# Altium PCB magicGlove.PcbDoc
Units mil, origin at the board's own origin, x right, y up, seen from the top; angles counter-clockwise.
Board outline 3937.01 x 3937.01 mil, 2 copper layers (Top Layer, Bottom Layer); 87 components, 67 nets, 399 pads, 166 vias.
Unrouted connection lines stored in the file: 132.
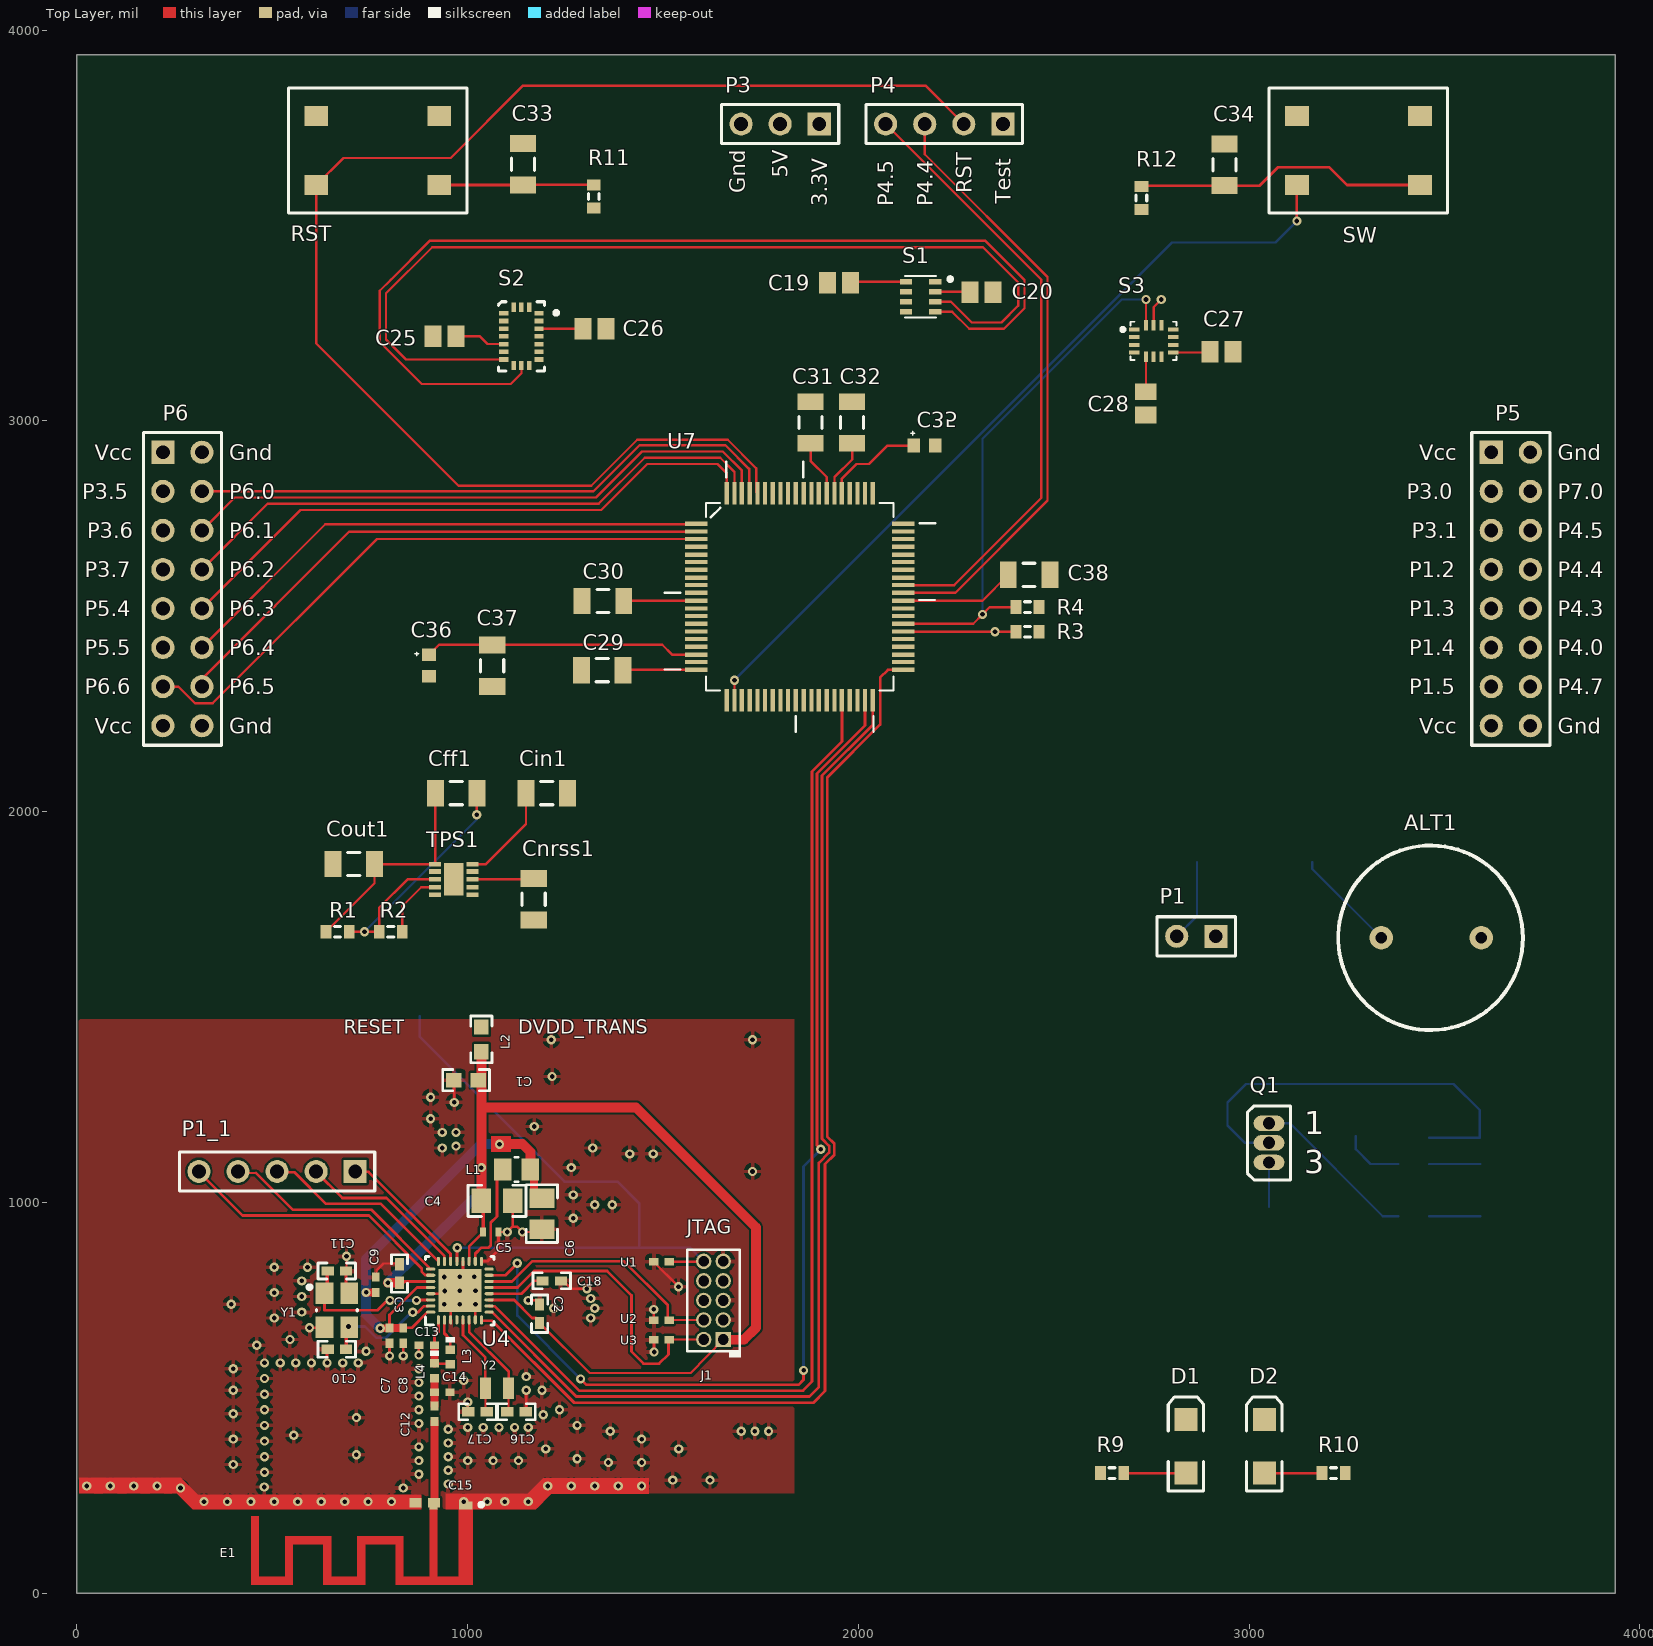
[diagram p0: Top Layer view]
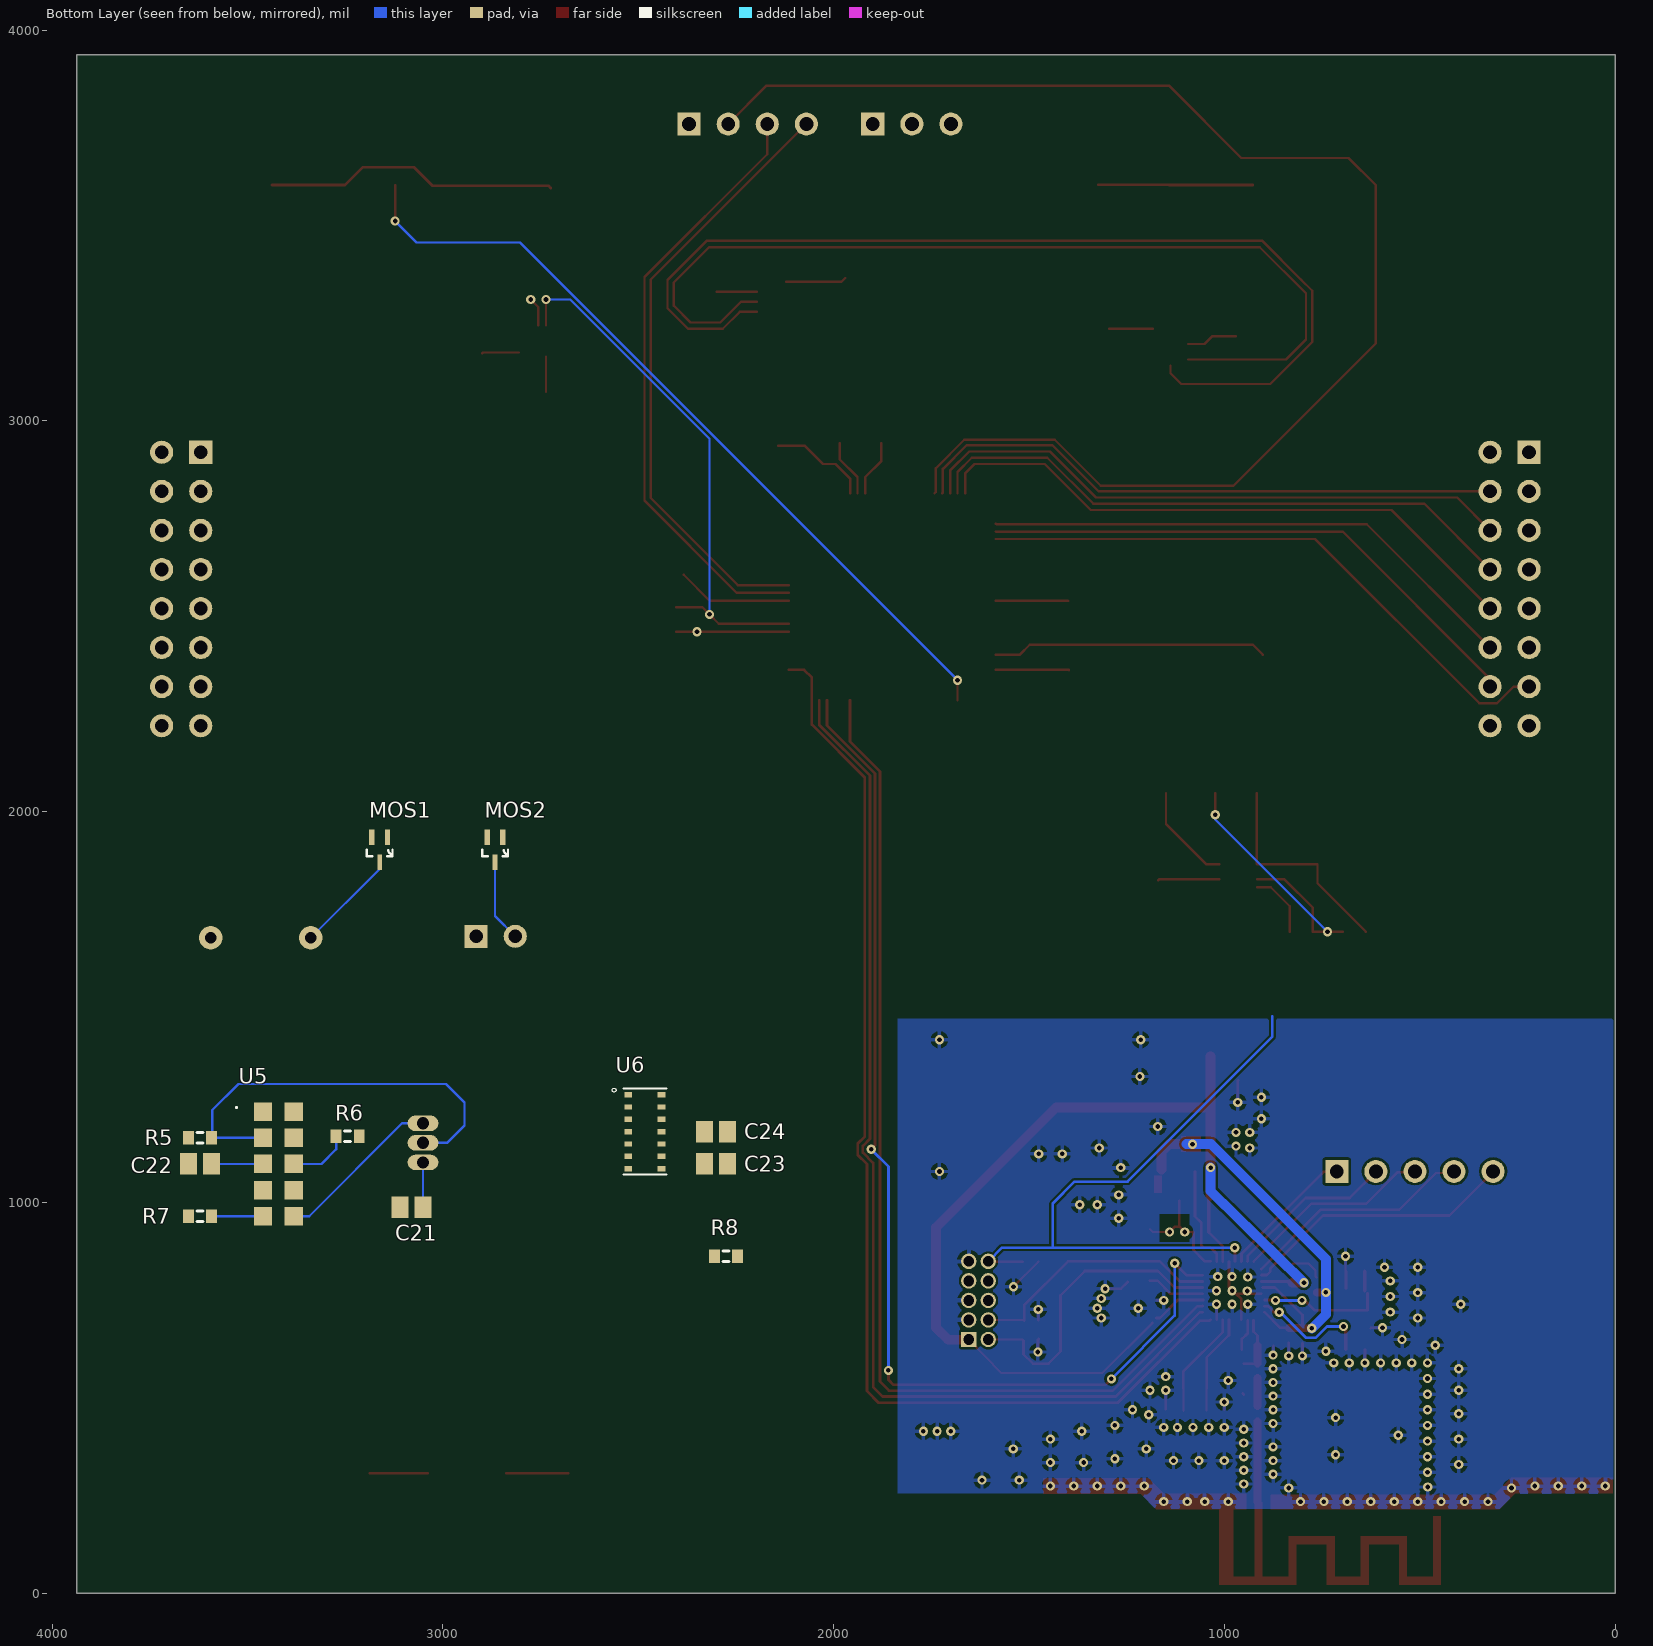
[diagram p1: Bottom Layer view, seen from below]

## Layer stack, top to bottom
Top Solder: solder mask 0.4, Solder Resist, Dk 3.5
Top Layer: signal copper 1.4
Dielectric1: dielectric 12.6, FR-4, Dk 4.8
Bottom Layer: signal copper 1.4
Bottom Solder: solder mask 0.4, Solder Resist, Dk 3.5

## Board outline
0,0 0,3937.01 3937.01,3937.01 3937.01,0

## Design rules (kind name [scope] priority, off if disabled: settings)
Clearance [All] p1: gap=6 ignorepadtopadclearanceinfootprint=FALSE
FabricationTestPointUsage TestPointUsage [All] p1: valid=0 allowmultiple=FALSE
FabricationTestpoint Testpoint [All] p1: side=3 testpointundercomponent=TRUE minsize=40 maxsize=100 preferedsize=60 minholesize=0 maxholesize=40 preferedholesize=32 testpointgrid=1 allowsidetop=TRUE allowsidebottom=TRUE usegrid=TRUE gridtolerance=0.01
PolygonConnect [All] p1: connectstyle=Relief reliefconductorwidth=10 reliefentries=4 polygonreliefangle="90 Angle" airgapwidth=10
RoutingVias [All] p1: holewidth=13.78 width=15.75 viastyle="Through Hole" minholewidth=11.81 minwidth=11.81 maxholewidth=236.22 maxwidth=255.91
SilkToSolderMaskClearance SilkscreenOverComponentPads [IsPad] p1: minsilkscreentomaskgap=10 clearancetoexposedcopper=TRUE
SolderMaskExpansion [All] p1: expansion=4
Width Width_1 [All] p1: maxlimit=10 minlimit=6 preferedwidth=6
Width 5v [InNet('5V')] p2: maxlimit=23.62 minlimit=5.98 preferedwidth=23.62
Width AVCC [InNet('AVCC')] p3: maxlimit=23.62 minlimit=5.98 preferedwidth=23.62
Width VCC [InNet('VCC')] p4: maxlimit=23.62 minlimit=5.98 preferedwidth=23.62
27 further rules are at their usual default settings.

## Classes and differential pairs
component class Actuadores: ALT1 MOS1 MOS2 P1
component class "AT short bus ( 7 x 4.8 inches)": Cff1 Cin1 Cnrss1 Cout1 R1 R2 TPS1
component class PuertosSensores: R3 R4
component class Sensores: C19 C20 C21 C22 C23 C24 C25 C26 C27 C28 Q1 R5 R6 R7 R8 S1 S2 S3 U5 U6
component class uProcesador: C29 C30 C31 C32 C33 C34 C35 C36 C37 C38 D1 D2 P3 P4 P5 P6 R9 R10 R11 R12 RST SW SW1 SW2

## Components (designator, comment, footprint, x,y, rotation, side; value= is the part's Value field where it differs from the comment)
ALT1 "*" Buzzer 3338.58,1677.17 r0 top
C1 "10uF" 0603 996.06,1312.99 r0 top
C2 "0.1uF" 0402 1184.31,715.17 r90 top
C3 "0.1uF" 0402 825.79,817.91 r90 top
C4 "10uF" 0805_HV 1075.31,1004.17 r0 top
C5 "0.1uF" 0402S 1059.21,924.17 r0 top
C6 "10uF" 0805_HV 1190.31,971.17 r270 top
C7 "0.1uF" 0402L 800.31,659.17 r270 top
C8 "0.1uF" 0402L 835.31,659.17 r270 top
C9 "" 0402L 765.31,789.17 r270 top value=10uF
C10 "" 0402 665.31,624.17 r180 top value=12pF (schematic designator C11)
C11 "" 0402 665.31,824.17 r0 top value=12pF (schematic designator C10)
C12 "GRM1555C1H120JA01D" 0402L 915.31,459.17 r90 top value=12pF
C13 "GRM1555C1H1R2CA01D" 0402L 895.31,634.17 r180 top value=1.2pF
C14 "GRM1555C1H1R2CA01D" 0402L 935.31,514.17 r0 top value=1.2pF
C15 "GRM1555C1H1R2CA01D" 0402 890.31,231.17 r0 top value=1.2pF
C16 "GRM1555C1H120JA01D" 0402 1125.31,464.17 r0 top value=12pF (schematic designator C17)
C17 "GRM1555C1H120JA01D" 0402 1025.31,464.17 r0 top value=12pF (schematic designator C16)
C18 "GRM155R61A105KE15D" 0402 1215.31,799.17 r180 top value=1uF
C19 "" C0805 1950.79,3354.33 r180 top value=100pF
C20 "" C0805 2315,3330 r0 top value=100pF
C21 "" C0805 3080.71,988.19 r0 bottom value=100pF
C22 "" C0805 3622.05,1098.43 r0 bottom value=100pF
C23 "" C0805 2301.18,1098.43 r180 bottom value=100pF
C24 "" C0805 2301.18,1181.1 r180 bottom value=100pF
C25 "" C0805 940.95,3216.54 r180 top value=100pF
C26 "" C0805 1324.8,3236.22 r0 top value=100pF
C27 "" C0805 2929.13,3177.17 r0 top value=100pF
C28 "" C0805 2736.22,3045.28 r270 top value=100pF
C29 "" C1206 1344.49,2362.2 r180 top value=100pF
C30 "" C1206 1346.46,2539.37 r0 top value=100pF
C31 "" C1206 1877.95,2996.06 r90 top value=100pF
C32 "" C1206 1984.25,2996.06 r90 top value=100pF
C33 "" C1206 1141.73,3657.48 r270 top value=100pF
C34 "" C1206 2937.01,3655.51 r270 top value=100pF
C35 "" "Cap Pol" 2169.29,2937.01 r180 top value=10uF
C36 "" "Cap Pol" 901.57,2374.02 r90 top value=10uF
C37 "" C1206 1062.99,2374.02 r90 top value=100pF
C38 "" C1206 2437.01,2606.3 r180 top value=100pF
Cff1 "" C1206 970.47,2047.24 r180 top value=100pF
Cin1 "" C1206 1202.76,2047.24 r180 top value=100pF
Cnrss1 "" C1206 1169.29,1775.59 r90 top value=100pF
Cout1 "" C1206 708.66,1866.14 r0 top value=100pF
D1 "" 3.2X1.6X1.1 2838.58,375.98 r90 top
D2 "" 3.2X1.6X1.1 3039.37,375.98 r90 top
E1 "ANTENNA_IIFA" ANTENNA_IIFA 995.31,234.17 r180 top net-tie
J1 "" CONN_GRPB052VWVN-RC 1629.31,749.17 r90 top
L1 "" 0805_145 1125.31,1084.17 r0 top value=10uH
L2 "BLM18HE152SN1D" 0603 1035.43,1417.32 r270 top value="1500 ohm"
L3 "LQG15HS15NJ02D" IND_LQG15H 955.31,604.17 r270 top value=15nH
L4 "LQG15HS2N0S02D" IND_LQG15H 915.31,569.17 r270 top value=2nH
MOS1 "*" SOT-523 3161.42,1901.57 r270 bottom
MOS2 "*" SOT-523 2866.14,1901.57 r270 bottom
P1 "" HDR1X2 2914.96,1681.1 r180 top
P1_1 "Header 5" HDR1X5 712.31,1079.17 r180 top (schematic designator P1)
P3 "" HDR1X3 1900,3760 r180 top
P4 "" HDR1X4 2370,3760 r180 top
P5 "" HDR2X8 3620,2920 r270 top
P6 "" HDR2X8 220,2920 r270 top
Q1 "" E3 3051.18,1152.36 r0 top
R1 "" J1-0603 667.32,1692.91 r180 top value=1K
R2 "" J1-0603 803.15,1692.91 r180 top value=1K
R3 "" J1-0603 2433.07,2460.63 r0 top value=1K
R4 "" J1-0603 2433.07,2523.62 r0 top value=1K
R5 "" J1-0603 3622.05,1165.35 r0 bottom value=1K
R6 "" J1-0603 3244.09,1169.29 r0 bottom value=1K
R7 "" J1-0603 3622.05,964.57 r180 bottom value=1K
R8 "" J1-0603 2275.59,862.2 r180 bottom value=1K
R9 "" J1-0603 2649.61,307.09 r0 top value=1K
R10 "" J1-0603 3216.54,307.09 r180 top value=1K
R11 "" J1-0603 1322.83,3574.8 r270 top value=1K
R12 "" J1-0603 2724.41,3570.87 r270 top value=1K
RST "*" CKN9085CT 770,3710 r180 top (schematic designator SW1)
S1 "*" LGA-8_BMP280(Primary) 2159.45,3317.91 r0 top
S2 "BMX055" LGA_PACKAGE_20_PINS 1137.8,3216.54 r0 top
S3 "*" LGA14R50P5X4_300X250X83 2755.91,3204.72 r0 top
SW "*" CKN9085CT 3280,3710 r180 top (schematic designator SW2)
TPS1 "TPS63030DSKT" SON50P260X260X80-11N 964.57,1826.77 r0 top
U1 "TPD1E10B06DPYR" DPY0002A 1496.31,848.17 r180 top
U2 "TPD1E10B06DPYR" DPY0002A 1496.31,698.17 r180 top
U3 "TPD1E10B06DPYR" DPY0002A 1496.31,648.17 r180 top
U4 "*" RSM0032B_NV 980.31,774.17 r90 top value=Value
U5 "VCNL4100" VISHAY_VCNL4100_8X3X1.8 3421.26,1098.42 r180 bottom
U6 "MAX30100EFD+" LGA14R80P2X7_560X280X130 2483.27,1181.1 r180 bottom
U7 "MSP430F5529IPN" QFP50P1400X1400X160-80N 1850,2550 r0 top
Y1 "TSX-3225 24.0000MF20G-AC0-ND" EPSON_TSX-3225 665.31,724.17 r0 top
Y2 "FC-12M 32.7680KA-A3" Epson_FC-12M 1075.31,524.17 r0 top

## Footprints (in the part's own frame and the unit in brackets; to place one, negate y for a bottom-side part, rotate by r counter-clockwise, add the part's x,y. Pads: shape width x height; smd on the part's side, far side on the other; paste and mask are expansions set on the pad)
3.2X1.6X1.1 [mm] "SMT LED; 2 Flat Leads"
  rect 1.5x1.5 smd: 1(-1.75,0) 2(1.75,0)
  silkscreen extent -2.9,-1.15 3.2,1.15
0402 [mm] "0402 from SM-752 data"
  rect 0.8x0.6 smd: 1(-0.6,0) 2(0.6,0)
  silkscreen extent -1.22,-0.52 1.22,0.52, body extent -0.55,-0.3 0.55,0.3, height 0.6
0402L [mm] "0402 from SM-752 data"
  rect 0.6x0.5 smd: 1(-0.5,0) 2(0.5,0)
  body extent -0.55,-0.3 0.55,0.3, height 0.6
0402S [mil] "Based on C0402S footprint from PADS legacy"
  rect 15x24 smd: 1(-20,0) 2(20,0)
  body extent -22,-12 22,12, height 24
0603 [mm] "0603 from SM-752 data"
  rect 1x0.95 smd: 1(-0.8,0) 2(0.8,0)
  silkscreen extent -1.52,-0.69 1.52,0.69, body extent -0.87,-0.47 0.87,0.47, height 1
0805_145 [mm] "0805 / 1.45mm height"
  rect 1.15x1.45 smd: 1(-0.9,0) 2(0.9,0)
  silkscreen extent -0.1,-0.8 0.1,0.8, body extent -1.1,-0.72 1.1,0.72, height 1.45
0805_HV [mil] "0805 with 30mil clearance between pads"
  rect 50x63 smd: 1(-40,0) 2(40,0)
  silkscreen extent -74,-40 74,40, body extent -43,-29 43,29, height 57
ANTENNA_IIFA [mm] "PCB Antenna, 2-Leads"
  rect 0.9x0.5 smd paste-1 mask-1: 1(0,0.25)
  rect 0.5x0.5 smd paste-1 mask-1: 2(2.1,0.25)
  Top Layer region: -0.45,0 -0.45,5.4 4.55,5.4 4.55,2.76 6.55,2.76 6.55,5.4 9.25,5.4 9.25,2.76 11.25,2.76 11.25,5.4 13.95,5.4 13.95,0.96 13.45,0.96 13.45,4.9 11.75,4.9 11.75,2.26 8.75,2.26 8.75,4.9 7.05,4.9 7.05,2.26 4.05,2.26 4.05,4.9 2.35,4.9 2.35,0 1.85,0 1.85,4.9 0.45,4.9 0.45,0
  silkscreen extent -1.1,0.11 -0.9,0.31
Buzzer [mil]
  round 60 hole 30: 1(0,0) 2(255.91,0)
  silkscreen extent -110,-236 362,236
C0805 [mm] "Chip Capacitor, Body 2.0x1.3mm, IPC High Density"
  rect 1.1x1.4 smd: 1(-0.75,0) 2(0.75,0)
  body extent -1.1,-0.72 1.1,0.72, height 1.4
C1206 [mm] "Chip Capacitor, Body 3.2x1.6mm, IPC High Density"
  rect 1.1x1.7 smd: 1(-1.35,0) 2(1.35,0)
  silkscreen extent -0.4,-0.75 0.4,0.75, body extent -1.7,-0.9 1.7,0.9, height 1.3
"Cap Pol" [mm] "Chip Capacitor, Body 1.6x0.8mm, IPC High Density"
  rect 0.8x0.9 smd: 1(-0.7,0) 2(0.7,0)
  silkscreen extent 0.65,-0.94 0.88,-0.69, body extent -0.87,-0.48 0.87,0.48, height 1.3
CKN9085CT [mm]
  rect 1.55x1.3 smd: 1(-4,2.7) 2(4,2.7) 3(-4,-1.8) 4(4,-1.8)
  silkscreen extent -5.8,-3.6 5.8,4.5, body extent -4.5,-2.6 4.5,3.4, height 5
CONN_GRPB052VWVN-RC [mm] "SULLINS"
  rect 1x1 hole 0.7 mask+0.08: 1(-2.54,-0.635)
  round 1 hole 0.7 mask+0.08: 2(-2.54,0.635) 3(-1.27,-0.635) 4(-1.27,0.635) 5(0,-0.635) 6(0,0.635) 7(1.27,-0.635) 8(1.27,0.635) 9(2.54,-0.635) 10(2.54,0.635)
  silkscreen extent -3.7,-1.8 3.3,1.7, body extent -3.17,-1.7 3.17,1.7, height 4
DPY0002A [mm] "R-PX2SON-N2"
  rect 0.6x0.5 smd: 1(-0.5,0) 2(0.5,0)
  body extent -0.55,-0.35 0.55,0.35, height 0.4
E3 [mm] "TO, Flat Index; 3 In-Line, Axial Leads; Body Dia. 4.6mm; Lead Dia. 0.5 mm (max)"
  oval 2x1 hole 0.8: 1(0,1.27) 2(0,0) 3(0,-1.27)
  silkscreen extent -1.41,-2.41 1.41,2.41
Epson_FC-12M [mm] "Epson"
  rect 0.7x1.4 smd: 1(-0.75,0) 2(0.75,0)
  body extent -1.05,-0.63 1.05,0.63, height 0.6
EPSON_TSX-3225 [mm] "SMD, 4-Leads, Body 2.65x3.35mm, Height 0.6mm"
  rect 1.15x1.4 smd: 1(-0.8,1.1) 2(-0.8,-1.1) 3(0.8,-1.1) 4(0.8,1.1)
  silkscreen extent -1.9,-0.05 1.33,1.62, body extent -1.33,-1.68 1.33,1.68, height 0.61
HDR1X2 [mm] "Connector; Header; 2 Position"
  rect 1.5x1.5 hole 0.9: 1(0,0)
  round 1.5 hole 0.9: 2(2.54,0)
  silkscreen extent -1.27,-1.27 3.81,1.27
HDR1X3 [mm] "Connector; Header; 3 Position"
  rect 1.5x1.5 hole 0.9: 1(0,0)
  round 1.5 hole 0.9: 2(2.54,0) 3(5.08,0)
  silkscreen extent -1.27,-1.27 6.35,1.27
HDR1X4 [mm] "Connector; Header; 4 Position"
  rect 1.5x1.5 hole 0.9: 1(0,0)
  round 1.5 hole 0.9: 2(2.54,0) 3(5.08,0) 4(7.62,0)
  silkscreen extent -1.27,-1.27 8.89,1.27
HDR1X5 [mm] "Connector; Header; 5 Position"
  rect 1.5x1.5 hole 0.9: 1(0,0)
  round 1.5 hole 0.9: 2(2.54,0) 3(5.08,0) 4(7.62,0) 5(10.16,0)
  silkscreen extent -1.27,-1.27 11.43,1.27
HDR2X8 [mm] "Connector; Header; 8x2 Position"
  rect 1.5x1.5 hole 0.9: 1(0,0)
  round 1.5 hole 0.9: 2(0,2.54) 3(2.54,0) 4(2.54,2.54) 5(5.08,0) 6(5.08,2.54) 7(7.62,0) 8(7.62,2.54) 9(10.16,0) 10(10.16,2.54) 11(12.7,0) 12(12.7,2.54) 13(15.24,0) 14(15.24,2.54) 15(17.78,0) 16(17.78,2.54)
  silkscreen extent -1.27,-1.27 19.05,3.81
IND_LQG15H [mm] "MuRata"
  rect 0.55x0.6 smd: 1(-0.475,0) 2(0.475,0)
  silkscreen extent -1.3,-0.3 -0.95,0.3, body extent -0.52,-0.27 0.52,0.27, height 0.55
J1-0603 [mm] "Chip Resistor, Body 1.6x0.8mm, IPC High Density"
  rect 0.7x0.9 smd: 1(-0.75,0) 2(0.75,0)
  silkscreen extent -0.2,-0.35 0.2,0.35, body extent -0.85,-0.48 0.85,0.48, height 0.9
LGA14R50P5X4_300X250X83 [mm]
  rect 0.675x0.25 smd paste-25.4 mask-25.4: 1(-1.263,0.75) 2(-1.263,0.25) 3(-1.263,-0.25) 4(-1.263,-0.75) 8(1.263,-0.75) 9(1.263,-0.25) 10(1.263,0.25) 11(1.263,0.75)
  rect 0.25x0.675 smd paste-25.4 mask-25.4: 5(-0.5,-1.012) 6(0,-1.012) 7(0.5,-1.012) 12(0.5,1.013) 13(0,1.013) 14(-0.5,1.013)
  silkscreen extent -2.1,-1.25 1.5,1.25
LGA14R80P2X7_560X280X130 [mm]
  rect 0.5x0.35 smd paste-25.4 mask-25.4: 1(-1.075,2.4) 2(-1.075,1.6) 3(-1.075,0.8) 4(-1.075,0) 5(-1.075,-0.8) 6(-1.075,-1.6) 7(-1.075,-2.4) 8(1.075,-2.4) 9(1.075,-1.6) 10(1.075,-0.8) 11(1.075,0) 12(1.075,0.8) 13(1.075,1.6) 14(1.075,2.4)
  silkscreen extent -2.13,-2.8 1.4,2.83
LGA-8_BMP280(Primary) [mm]
  rect 0.8x0.35 smd paste-25.4 mask-25.4: P1(0.95,0.975) P2(0.95,0.325) P3(0.95,-0.325) P4(0.95,-0.975) P5(-0.95,-0.975) P6(-0.95,-0.325) P7(-0.95,0.325) P8(-0.95,0.975)
  silkscreen extent -1,-1.35 2.02,1.35
LGA_PACKAGE_20_PINS [mm]
  rect 0.6x0.3 smd: 1(1.15,1.5) 2(1.15,1) 3(1.15,0.5) 4(1.15,0) 5(1.15,-0.5) 6(1.15,-1) 7(1.15,-1.5) 11(-1.15,-1.5) 12(-1.15,-1) 13(-1.15,-0.5) 14(-1.15,0) 15(-1.15,0.5) 16(-1.15,1) 17(-1.15,1.5)
  rect 0.3x0.6 smd: 8(0.5,-1.9) 9(0,-1.9) 10(-0.5,-1.9) 18(-0.5,1.9) 19(0,1.9) 20(0.5,1.9)
  silkscreen extent -1.5,-2.25 2.39,2.25
QFP50P1400X1400X160-80N [mil]
  rect 58x11 smd paste-1000 mask-1000: 1(-265,187) 2(-265,167) 3(-265,148) 4(-265,128) 5(-265,108) 6(-265,89) 7(-265,69) 8(-265,49) 9(-265,30) 10(-265,10) 11(-265,-10) 12(-265,-30) 13(-265,-49) 14(-265,-69) 15(-265,-89) 16(-265,-108) 17(-265,-128) 18(-265,-148) 19(-265,-167) 20(-265,-187) 41(265,-187) 42(265,-167) 43(265,-148) 44(265,-128) 45(265,-108) 46(265,-89) 47(265,-69) 48(265,-49) 49(265,-30) 50(265,-10) 51(265,10) 52(265,30) 53(265,49) 54(265,69) 55(265,89) 56(265,108) 57(265,128) 58(265,148) 59(265,167) 60(265,187)
  rect 11x58 smd paste-1000 mask-1000: 21(-187,-265) 22(-167,-265) 23(-148,-265) 24(-128,-265) 25(-108,-265) 26(-89,-265) 27(-69,-265) 28(-49,-265) 29(-30,-265) 30(-10,-265) 31(10,-265) 32(30,-265) 33(49,-265) 34(69,-265) 35(89,-265) 36(108,-265) 37(128,-265) 38(148,-265) 39(167,-265) 40(187,-265) 61(187,265) 62(167,265) 63(148,265) 64(128,265) 65(108,265) 66(89,265) 67(69,265) 68(49,265) 69(30,265) 70(10,265) 71(-10,265) 72(-30,265) 73(-49,265) 74(-69,265) 75(-89,265) 76(-108,265) 77(-128,265) 78(-148,265) 79(-167,265) 80(-187,265)
  silkscreen extent -346,-346 347,346
RSM0032B_NV [mm]
  oval 0.6x0.2 smd paste+0 mask+0.051: 1(-1.9,1.4) 2(-1.9,1) 3(-1.9,0.6) 4(-1.9,0.2) 5(-1.9,-0.2) 6(-1.9,-0.6) 7(-1.9,-1) 8(-1.9,-1.4) 17(1.9,-1.4) 18(1.9,-1) 19(1.9,-0.6) 20(1.9,-0.2) 21(1.9,0.2) 22(1.9,0.6) 23(1.9,1) 24(1.9,1.4)
  oval 0.2x0.6 smd paste+0 mask+0.051: 9(-1.4,-1.9) 10(-1,-1.9) 11(-0.6,-1.9) 12(-0.2,-1.9) 13(0.2,-1.9) 14(0.6,-1.9) 15(1,-1.9) 16(1.4,-1.9) 25(1.4,1.9) 26(1,1.9) 27(0.6,1.9) 28(0.2,1.9) 29(-0.2,1.9) 30(-0.6,1.9) 31(-1,1.9) 32(-1.4,1.9)
  rect 2.8x2.8 smd paste-1.387 mask+0.051: 33(0,0)
  silkscreen extent -2.22,-2.23 2.22,2.23, body extent 0,0 0.25,0.25, height 0.25
SON50P260X260X80-11N [mil]
  rect 30x12 smd paste-1000 mask-1000: 1(-48,39) 2(-48,20) 3(-48,0) 4(-48,-20) 5(-48,-39) 6(48,-39) 7(48,-20) 8(48,0) 9(48,20) 10(48,39)
  rect 51x83 smd paste-1000 mask-1000: 11(0,0)
SOT-523 [mil]
  rect 40x14 smd paste-1000 mask-1000: 1(-33.38,19.37) 2(-33.38,-20.63)
  rect 40x12 smd paste-1000 mask-1000: 3(30.62,-0.63)
  silkscreen extent -1,-34 16,32
VISHAY_VCNL4100_8X3X1.8 [mm]
  rect 1.2x1.2 smd paste-25.4 mask-25.4: 1(-1,3.4) 2(-1,1.7) 3(-1,0) 4(-1,-1.7) 5(-1,-3.4) 6(1,-3.4) 7(1,-1.7) 8(1,0) 9(1,1.7) 10(1,3.4)
  silkscreen extent -2.78,3.62 -2.68,3.72

## Part data
ALT1: library part ABT-407
C1: library part C1608X5R1A106M08, "Imported", Manufacturer_Part_Number=C1608X5R1A106M080AC, C="Copyright (C) 2015 Accelerated Designs. All rights reserved", Copyright="Copyright (C) 2015 Accelerated Designs. All rights reserved", Vendor=TDK
C2 C3 C4 C5 C6 C7 C8: library part GRM155R71A104KA0, "Imported", Manufacturer_Part_Number=GRM155R71A104KA01D, Value1=10V, C="Copyright (C) 2015 Accelerated Designs. All rights reserved", Copyright="Copyright (C) 2015 Accelerated Designs. All rights reserved", Vendor=Murata
C9 C10 C11 C29 C30 C31 C32 C33 C34 C37 C38 Cff1 Cin1 Cnrss1 Cout1: library part "Cap Semi", "Capacitor (Semiconductor SIM Model)", LatestRevisionDate=29-May-2009, LatestRevisionNote="IPC-7351 Footprint Added.", PackageDescription="Chip Capacitor", PackageReference=C1206, Published=8-Jun-2000, Publisher="Altium Limited"
C12 C16 C17: "CAP, CERM, 12 pF, 50 V, +/- 5%, C0G/NP0, 0402", Cap_Case=0402, Manufacturer=MuRata, Supplier Part Number 1=81-GRM1555C1H120JA1D, TempCo=C0G/NP0, Tolerance_%=5, Value1=Unknown, Value2=50V, ValueDisplayed=12pF, AEC Category=Q200, AEC Qualified=?, Cap_F=0.000000000012, ComponentLink1Description="Datasheet link", ComponentLink1URL=http://search.murata.co.jp/Ceramy/PnsearchViewAction.do?HnOFG=ON&HnNFG=ON&SEL_CNT=50&sLang=en&sKey=GRM1555C1H120JA01D&x=9&y=9&search=startwith, CompType=Capacitor, LatestRevisionDate=2016-02-01, MountType=SMT, PackageReference=0402, PartNumber=GRM1555C1H120JA01D, Polarized=N, Published=2008-06-19, Publisher="Texas Instruments", RoHS=Y, Supplier 1=Mouser, Supplier 2=Farnell, Supplier 3=Newark, Supplier Part Number 2=1828875, Supplier Part Number 3=14T3292, SymbolVersion=2008-07-09, TaMax_C=125, TaMin_C=-55, Technology=Ceramic, U/M=EA, VDC_V=50
C13 C14 C15: "CAP, CERM, 1.2 pF, 50 V, +/- 5%, C0G/NP0, 0402", Cap_Case=0402, Manufacturer=MuRata, Supplier Part Number 1=81-GRM1555C1H1R2CA1D, TempCo=C0G/NP0, Tolerance_%=5, Value1=Unknown, Value2=50V, ValueDisplayed=1.2pF, AEC Category=Q200, AEC Qualified=?, Cap_F=0.0000000000012, ComponentLink1Description="Datasheet link", ComponentLink1URL=http://search.murata.co.jp/Ceramy/image/img/PDF/ENG/GRM1555C1H1R2CA01.pdf, CompType=Capacitor, LatestRevisionDate=2016-02-01, MountType=SMT, PackageReference=0402, PartNumber=GRM1555C1H1R2CA01D, Polarized=N, Published=2008-06-19, Publisher="Texas Instruments", RoHS=Y, Supplier 1=Mouser, SymbolVersion=2008-07-09, TaMax_C=125, TaMin_C=-55, Technology=Ceramic, U/M=EA, VDC_V=50
C18: "CAP, CERM, 1 µF, 10 V, +/- 10%, X5R, 0402", Cap_Case=0402, Manufacturer=MuRata, Supplier Part Number 1=490-3890-1-ND, TempCo=X5R, Tolerance_%=10, Value1=Unknown, Value2=10V, ValueDisplayed=1µF, AEC Category=Q200, AEC Qualified=?, Cap_F=0.000001, ComponentLink1Description="Datasheet link", ComponentLink1URL=http://search.murata.co.jp/Ceramy/PnsearchViewAction.do?HnOFG=ON&HnNFG=ON&SEL_CNT=50&sLang=en&sKey=GRM155R61A105KE15D&x=9&y=9&search=startwith, CompType=Capacitor, LatestRevisionDate=2016-01-22, MountType=SMT, PackageReference=0402, PartNumber=GRM155R61A105KE15D, Polarized=N, Published=2008-06-19, Publisher="Texas Instruments", RoHS=Y, Supplier 1=Digi-Key, Supplier 2=Mouser, Supplier 3=Farnell, Supplier Part Number 2=81-GRM155R61A105KE15, Supplier Part Number 3=1735523, SymbolVersion=2008-07-09, TaMax_C=85, TaMin_C=-55, Technology=Ceramic, U/M=EA, VDC_V=10
C19 C20 C21 C22 C23 C24 C25 C26 C27 C28: library part "Cap Pol3", "Polarized Capacitor (Surface Mount)", LatestRevisionDate=29-May-2009, LatestRevisionNote="IPC-7351 Footprint Added.", PackageDescription="Chip Capacitor", PackageReference=C0805, Published=8-Jun-2000, Publisher="Altium Limited"
C35 C36: library part "Cap Pol", "Capacitor pol", LatestRevisionDate=29-May-2009, LatestRevisionNote="IPC-7351 Footprint Added.", PackageDescription="Chip Capacitor", PackageReference=C1206, Published=8-Jun-2000, Publisher="Altium Limited"
D1 D2: library part LED2, "Typical RED, GREEN, YELLOW, AMBER GaAs LED", LatestRevisionDate=17-Jul-2002, LatestRevisionNote="Re-released for DXP Platform.", PackageDescription="SM LED; 2 Flat Leads", PackageReference=3.2X1.6X1.1, PackageVersion=Feb-2002, Published=8-Jun-2000, Publisher="Altium Limited"
E1: "PCB Antenna.  There is nothing to buy or mount.", Manufacturer=N/A, ComponentLink1Description="Datasheet Link", ComponentLink1URL=http://www.ti.com/lit/an/swra117d/swra117d.pdf, CompType=Antenna, LatestRevisionDate=2015-03-27, MountType=N/A, PackageReference="PCB Antenna, 2-Leads", PartNumber=ANTENNA_IIFA, Publisher="Texas Instruments", SymbolCreator=Altium, SymbolVersion=2014-08-20
J1: library part "Header 5X2", "Header, 5-Pin, Dual row", LatestRevisionDate=17-Jul-2002, LatestRevisionNote="Re-released for DXP Platform.", Publisher="Altium Limited"
L1: library part "Inductor Iron", "Magnetic-Core Inductor", LatestRevisionDate=17-Jul-2002, LatestRevisionNote="Re-released for DXP Platform.", PackageDescription="Axial Device, Thru-Hole; 2 Leads; 0.9 in Pin Spacing", PackageReference=AXIAL-0.9, Published=24-Mar-1999, Publisher="Altium Limited"
L2: "Ferrite Bead, 1500 ohm @ 100 MHz, 0.5 A, 0603", Manufacturer=MuRata, Supplier Part Number 1=490-5216-1-ND, Value1="0.5 ohm", Value2=0.5A, ComponentLink1Description="Datasheet link", ComponentLink1URL=http://search.murata.co.jp/Ceramy/image/img/PDF/ENG/L0110S0101BLM18H.pdf, CompType="Ferrite Bead", DCR_ohm=0.5, Imax_A=0.5, LatestRevisionDate=2016-02-02, MountType=SMT, PackageReference=0603, PartNumber=BLM18HE152SN1D, Published=2014-04-30, Publisher="Texas Instruments", RoHS=Y, Supplier 1=Digi-Key, Supplier 2=Mouser, Supplier 3=Farnell, Supplier Part Number 2=81-BLM18HE152SN1D, Supplier Part Number 3=2443237RL, SymbolVersion=2009-06-02, Ztyp@1GHz_Ohm=1500, ZTyp@100MHz_Ohm=1500
L3: "Inductor, Multilayer, Air Core, 15 nH, 0.3 A, 0.32 ohm, SMD", Manufacturer=MuRata, Supplier Part Number 1=490-2625-1-ND, Value1="0.32 ohm", Value2=0.3A, ValueDisplayed=15nH, AEC Category=Q200, AEC Qualified=?, ComponentLink1Description="Datasheet link", ComponentLink1URL=http://search.murata.co.jp/Ceramy/image/img/PDF/ENG/L0075S0083LQG15HS.pdf, CompType=Inductor, DCR_ohm=0.32, Imax_A=0.3, Ind_H=15.0E-9, Irms="0.3A @ C rise", Isat="0.3A @ % inductance drop", LatestRevisionDate=2016-01-08, Material="Air Core", MountType=SMT, PackageReference="0402 polarized", PartNumber=LQG15HS15NJ02D, Published=2008-06-26, Publisher="Texas Instruments", RoHS=Y, Supplier 1=Digi-Key, Supplier 2=Mouser, Supplier Part Number 2=81-LQG15HS15NJ02D, SymbolVersion=2008-07-23, Technology=Multilayer
L4: "Inductor, Multilayer, Air Core, 2 nH, 0.3 A, 0.1 ohm, SMD", Manufacturer=MuRata, Supplier Part Number 1=490-6569-1-ND, Value1="0.1 ohm", Value2=0.3A, ValueDisplayed=2nH, AEC Category=Q200, AEC Qualified=?, ComponentLink1Description="Datasheet link", ComponentLink1URL=http://search.murata.co.jp/Ceramy/image/img/PDF/ENG/L0075S0083LQG15HS.pdf, CompType=Inductor, DCR_ohm=0.1, Imax_A=0.3, Ind_H=2.0E-9, Irms="0.3A @ C rise", Isat="0.3A @ % inductance drop", LatestRevisionDate=2016-01-08, Material="Air Core", MountType=SMT, PackageReference="0402 polarized", PartNumber=LQG15HS2N0S02D, Published=2008-06-26, Publisher="Texas Instruments", RoHS=Y, Supplier 1=Digi-Key, Supplier 2=Mouser, Supplier Part Number 2=81-LQG15HS2N0S02D, SymbolVersion=2008-07-23, Technology=Multilayer
MOS1 MOS2: library part MOSFETN
P1: library part "Header 2", "Header, 2-Pin", LatestRevisionDate=17-Jul-2002, LatestRevisionNote="Re-released for DXP Platform.", Publisher="Altium Limited"
P1_1: "Header, 5-Pin", LatestRevisionDate=17-Jul-2002, LatestRevisionNote="Re-released for DXP Platform.", Publisher="Altium Limited"
P3: library part "Header 3", "Header, 3-Pin", LatestRevisionDate=17-Jul-2002, LatestRevisionNote="Re-released for DXP Platform.", Publisher="Altium Limited"
P4: library part "Header 4", "Header, 4-Pin", LatestRevisionDate=17-Jul-2002, LatestRevisionNote="Re-released for DXP Platform.", Publisher="Altium Limited"
P5 P6: library part "Header 8X2", "Header, 8-Pin, Dual row", LatestRevisionDate=17-Jul-2002, LatestRevisionNote="Re-released for DXP Platform.", Publisher="Altium Limited"
Q1: library part MOSFET-P, "P-Channel MOSFET", LatestRevisionDate=17-Jul-2002, LatestRevisionNote="Re-released for DXP Platform.", PackageDescription="TO, Flat Index; 3 In-Line, Axial Leads; Body Dia. 4.6mm; Lead Dia. 0.5 mm (max)", PackageReference=E3, PackageVersion=1995/1996, Published=8-Jun-2000, Publisher="Altium Limited"
R1 R2 R3 R4 R5 R6 R7 R8 R9 R10 R11 R12: library part Res3, "Resistor", LatestRevisionDate=29-May-2009, LatestRevisionNote="IPC-7351 Footprint Added.", PackageDescription="Chip Resistor", PackageReference=J1-0603, Published=8-Jun-2000, Publisher="Altium Limited"
RST SW: library part CKN9085CT
S1: library part BMP280, "BMP280 Absolute Barometric Pressure Sensor for Battery Powered Devices 2 x 2.5mm", Package=None, Availability=Good, MF=Bosch, MP=BMP280, Price="2.16 USD"
S2: "Small versatile 9-axis sensor module", Manufacturer_Name="Bosch Sensortec", Datasheet Link=http://www.mouser.com/ds/2/621/BST-BMX055-DS000-02-586421.pdf, Height=mm, Manufacturer_Part_Number=BMX055, Supplier_Name=RS
S3: library part LSM6DSMTR, "Small versatile 6-axis acc&gyro"
TPS1: "TPS7A91 (ACTIVE)  1-A, High Accuracy, Low Noise LDO Voltage Regulator", Package="WSON-10 Texas Instruments", Availability=Good, MF="Texas Instruments", MP=TPS63030DSKT, Price="1.51 USD"
U1 U2 U3: "ESD in 0402 Package with 10 pF Capacitance and 6 V Breakdown, 1 Channel, -40 to +125 degC, 2-pin X2SON (DPY), Green (RoHS & no Sb/Br)", Alternate Manufacturer=None, Alternate PartNumber=Equivalent, Breakdown Voltage(Min)(V)=6, IO Capacitance(Typ)(pF)=10, Manufacturer="Texas Instruments", Supplier Part Number 1=296-30406-2-ND, ComponentLink1Description=Datasheet, ComponentLink1URL=http://www.ti.com/general/docs/lit/getliterature.tsp?genericPartNumber=TPD1E10B06&fileType=pdf, ComponentLink2Description="URL Link1", ComponentLink2URL=SamplesURL:http://www.ti.com/product/tpd1e10b06#samples, DatasheetVersion=SLLSEB1, Eco-Plan=TBD, IEC 61000-4-2 Air-Gap(+/- kV)=30, IEC 61000-4-2 Contact(+/- kV)=30, IO Leakage Current(nA)=10, MountType=SMT, PackageDescription="2-Pin Plastic Small Outline No-Lead 1.0 x 0.6 x 0.4 mm Body", PackageReference=DPY0002A, PackageVersion="revA, Apr-2010", PartNumber=TPD1E10B06DPYR, SubFamily="ESD Solution", Supplier 1=Digi-Key, Supplier 2=Digi-Key, Supplier 3=Digi-Key, Supplier 4=Newark, Supplier 5=Mouser, Supplier Part Number 2=296-30406-1-ND, Supplier Part Number 3=296-30406-6-ND, Supplier Part Number 4=94T1842, Supplier Part Number 5=595-TPD1E10B06DPYR
U4: library part CC2640R2FRSMR_1, "Imported", Manufacturer="Texas Instruments", PartNumber=CC2640R2FRSMR, RefDes=RefDes, TYPE=TYPE
U5: "High Sensitivity Long Distance Proximity Sensor. Dimensions (L x W x H in mm): 8", Package=None, Availability=Good, MF=Vishay, MP=VCNL4100, Price="3.52 USD"
U6: "Pulse Oximeter and Heart-Rate Sensor IC 14-Pin OLGA", Package=None, Availability=Good, MF="Maxim Integrated", MP=MAX30100EFD+, Price="4.00 USD"
U7: "16-Bit Ultra-Low-Power Microcontroller, 128KB Flash, 8KB RAM, USB, 12Bit ADC, 2 USCIs, 32Bit HW MPY 80-LQFP -40 to 85", Package="LQFP-80 Texas Instruments", Availability=Good, MF="Texas Instruments", MP=MSP430F5529IPN, Price="6.15 USD"
Y1: library part "TSX-3225 24.0000MF20G-AC3", Supplier 1=Digikey, Supplier Part Number 1="TSX-3225 24.0000MF20G-AC0-ND"
Y2: "Crystal, 32.768kHz, 12.5pF, SMD", Frequency=32.768KHZ, Frequency Stability=±20ppm, Manufacturer=Epson, Supplier Part Number 1=SER3672CT-ND, ComponentLink1Description="Datasheet Link", ComponentLink1URL=http://www.eea.epson.com/portal/pls/portal/docs/1/1587453.PDF, CompType=Crystal, LatestRevisionDate=2015-03-19, MountType=SMT, PackageReference="Crystal 2.05x.6x1.2mm", PartNumber="FC-12M 32.7680KA-A3", Publisher="Texas Instruments", RoHS=Y, Supplier 1=Digi-Key, Supplier 2=Mouser, Supplier Part Number 2=732-FC-12M-32.76KAA3, SymbolCreator=a0412235, SymbolVersion=2008-07-09, TaMax_C=85, TaMin_C=-40, U/M=EA

## Via types
v1: diameter 23.62, hole 11.81, Top Layer to Bottom Layer, tented both sides, 156 vias
v2: diameter 23.62, hole 11.81, Top Layer to Bottom Layer, 10 vias

## Nets (pads, with @x,y where several pads share a name; then routed paths per layer and width w, separated by ;. In a path a pad name is that pad's centre, name@x,y a point inside that pad or via, vN(x,y) a via of type N, cw(c..) or ccw(c..) an arc to the next point about the centre after c; other vN are vias at no path point)
5V: C35.2 P3.2 U7.65 | length 256.3
  Top Layer w6: U7.65 1958,2852.7 1995.07,2889.76 2027.56,2889.76 2074.8,2937.01 C35.2
AGND: C23.2 C30.1 MOS1.2 MOS2.2 U6.4 U7.14 U7.68
AVCC: ALT1.2 C21.1 C23.1 C30.2 P1.1 Q1.3 R5.2 U6.9 U6.10 U7.11 | length 299.8
  Top Layer w6: C30.2 1400.24,2540 U7.11
  Bottom Layer w6: C21.1 Q1.3
GND: C19.2 C20.2 C21.2 C22.2 C24.2 C25.2 C26.2 C27.2 C28.2 C29.2 C31.2 C32.2 C33.1 C34.1 C35.1 C36.1 C37.1 C38.1 Cin1.1 Cnrss1.1 Cout1.1 D1.2 D2.2 P3.3 P5.2 P5.16 P6.2 P6.16 R2.1 R7.1 RST.3 RST.4 S1.P1 S1.P5 S1.P7 S2.4 S2.6 S2.12 S2.17 S2.20 S3.1 S3.2 S3.3 S3.6 S3.7 SW.3 SW.4 TPS1.4 U5.1 U6.12 U7.19 U7.49 U7.61 | length 169.1
  Top Layer w6: R2.1 832.68,1757.87 881.57,1806.77 TPS1.4
NetALT1_1: ALT1.1 MOS1.3 | length 266.9
  Bottom Layer w6: MOS1.3 3162.05,1853.7 ALT1.1
NetC24_1: C24.1 Cff1.2 Cout1.2 R1.2 R8.1 TPS1.1 U6.11 | length 561.3
  Top Layer w6: R1.2 761.81,1816.93 Cout1.2 762.18,1865.77 TPS1.1 917.32,1866.53 Cff1.2
NetC29_1: C29.1 U7.20 | length 187.7
  Top Layer w6: C29.1 1398.43,2363 U7.20
NetC31_1: C31.1 U7.67 | length 144.9
  Top Layer w6: C31.1 1877.95,2897.64 1919,2856.59 U7.67
NetC32_1: C32.1 U7.66 | length 146.7
  Top Layer w6: U7.66 1939,2856.32 1984.25,2901.58 C32.1
NetC33_2: C33.2 R11.1 RST.1 | length 395.6
  Top Layer w7: RST.1 1141.1,3603.7 C33.2 R11.1
NetC34_2: C34.2 R12.1 SW.1 | length 754.1
  Top Layer w7: R12.1@2724.41,3596.46 2730.32,3602.36 C34.2 3027.56,3602.36 3074.8,3649.61 3204.72,3649.61 3250.63,3603.7 SW.1
NetCff1_1: Cff1.1 R1.1 R2.2 TPS1.3 | length 784.3
  Top Layer w6: R1.1 R2.2 773.62,1753.94 846.46,1826.77 TPS1.3 ; v2(1023.62,1992.13) Cff1.1
  Bottom Layer w6: v2(736.22,1692.91) 1023.62,1980.31 v2(1023.62,1992.13)
NetCnrss1_2: Cnrss1.2 TPS1.8 | length 157.5
  Top Layer w6: TPS1.8 1167.32,1826.77 Cnrss1.2@1169.29,1824.8
NetD1_1: D1.1 R9.2 | length 159.4
  Top Layer w6: R9.2 D1.1
NetD2_1: D2.1 R10.2 | length 147.6
  Top Layer w6: D2.1 R10.2
NetMOS2_3: MOS2.3 P1.2 | length 211.3
  Bottom Layer w6: P1.2 2866.77,1732.91 MOS2.3
NetQ1_1: Q1.1 U5.6 | length 429.2
  Bottom Layer w6: Q1.1 3104.72,1202.36 3342.52,964.57 U5.6
NetQ1_2: Q1.2 R5.1 U5.2 | length 1075.6
  Bottom Layer w6: Q1.2 2989.37,1152.36 2944.88,1196.85 2944.88,1255.91 2992.13,1303.15 3523.62,1303.15 3590.55,1236.22 R5.1@3590.55,1165.35 ; U5.2 R5.1@3588.58,1165.35
NetR7_2: R7.2 U5.5 | length 131.9
  Bottom Layer w6: U5.5 R7.2
NetU6_5: U6.5
NetU6_6: U6.6
P1.0: R10.1 U7.21
P1.1: SW.2 U7.22 | length 2069.8
  Top Layer w6: U7.22 v2(1683,2336.68) ; v2(3122.52,3511.81) SW.2
  Bottom Layer w6: v2(1683,2336.68) 2803.01,3456.69 3067.4,3456.69 v2(3122.52,3511.81)
P1.2: P5.7 U7.23
P1.3: P5.9 U7.24
P1.4: P5.11 U7.25
P1.5: P5.13 U7.26
P1.6: R8.2 U6.13 U7.27
P1.7: R6.2 U5.8 U7.28 | length 157.2
  Bottom Layer w6: R6.2 3273.62,1135.83 3311.02,1098.43 U5.8
P2.0: S3.4 U7.29
P2.1: S3.9 U7.30
P2.2: S2.10 U7.31
P2.3: S2.19 U7.32
P2.4: S2.1 U7.33
P2.5: S2.14 U7.34
P2.6: S2.15 U7.35
P2.7: U7.36 | length 2380.8
  Top Layer w7: 1285.53,518.17 1858.17,518.17 1881.31,541.31 1881.31,2103.11 1958,2179.79 U7.36
P3.0: P5.3 U7.37
P3.1: P5.5 U7.38
P3.2: U7.39 | length 1844.7
  Top Layer w7: 1832.68,533.05 1846.95,533.05 1860,546.09 v2(1860,570) ; v2(1904.07,1136.07) 1894.31,1145.83 1894.31,2097.72 2017,2220.41 U7.39
  Bottom Layer w7: v2(1860,570) 1860,1092 v2(1904.07,1136.07)
P3.3: U7.40 | length 2460.7
  Top Layer w7: 1278.31,503.17 1875.17,503.17 1899,527 1899,1100.86 1925.38,1127.24 1925.38,1144.9 1907.31,1162.96 1907.31,2092.34 2037,2222.03 U7.40
P3.4: U7.41 | length 2621.3
  Top Layer w7: 1272.92,487.17 1885.17,487.17 1915,517 1915,1098.48 1938.38,1121.86 1938.38,1150.28 1920.31,1168.35 1920.31,2086.95 2056,2222.64 2056,2343.4 2075.6,2363 U7.41
P3.5: P6.3 U7.42
P3.6: P6.5 U7.43
P3.7: P6.7 U7.44
P4.0: P5.14 U7.45
P4.1: R3.1 S1.P3 S2.11 S3.13 U5.9 U6.3 U7.46 | length 2819.9
  Top Layer w6: S2.11 842.52,3157.48 791.34,3208.66 791.34,3326.77 909.45,3444.88 2318.9,3444.88 2409.45,3354.33 2409.45,3295.28 2366.14,3251.97 2290.34,3251.97 2237.19,3305.12 S1.P3 ; U7.46 2115.37,2460.63 v2(2350,2460.63) R3.1 ; S3.13 2755.91,3291.34 v2(2775.59,3311.02)
P4.2: R4.1 S1.P4 S2.9 S3.14 U5.10 U6.2 U7.47 | length 4042.7
  Top Layer w6: S2.9 1137.8,3122.05 1110.24,3094.49 882.88,3094.49 775.34,3202.03 775.34,3333.4 803.65,3361.71 902.82,3460.88 2325.53,3460.88 2425.45,3360.96 2425.45,3288.65 2372.77,3235.97 2283.72,3235.97 2240.16,3279.53 S1.P4 ; U7.47 2293.99,2481 v2(2317.99,2505) 2336.61,2523.62 R4.1 ; S3.14 v2(2736.22,3311.02)
  Bottom Layer w6: v2(2317.99,2505) 2317.99,2954.71 2674.31,3311.02 v2(2736.22,3311.02)
P4.3: P5.12 U7.48
P4.4/UCA1TXD: P4.3 P5.10 U7.51 | length 1561
  Top Layer w6: U7.51 2247.98,2560 2484.25,2796.27 2484.25,3368.38 2170,3682.63 P4.3
P4.5/UCA1RXD: P4.4 P5.8 U7.52 | length 1567.6
  Top Layer w6: P4.4 2468.25,3361.75 2468.25,2802.9 2245.36,2580 U7.52
P4.7: P5.6 R9.1 U7.54
P5.4/XIN: P6.9 U7.12
P5.5/XOUT: P6.11 U7.13
P6.0: P6.4 U7.77 | length 1537.5
  Top Layer w6: P6.4 1322.12,2820 1440.12,2938 1659.88,2938 1720.5,2877.38 1720.5,2816.5 U7.77
P6.1: P6.6 U7.78 | length 1544.1
  Top Layer w6: P6.6 404,2804 1328.74,2804 1446.74,2922 1653.25,2922 1702,2873.25 U7.78
P6.2: P6.8 U7.79 | length 1551.2
  Top Layer w6: P6.8 488,2788 1335.37,2788 1453.37,2906 1646.63,2906 1683,2869.63 U7.79
P6.3: P6.10 U7.80 | length 1557.8
  Top Layer w6: P6.10 572,2772 1342,2772 1460,2890 1640,2890 1663,2867 U7.80
P6.4: P6.12 U7.1 | length 1396.3
  Top Layer w6: P6.12 635.5,2735.5 1583.5,2735.5 U7.1
P6.5: P6.14 U7.2 | length 1441.2
  Top Layer w6: P6.14 320,2340 696.5,2716.5 1584.5,2716.5 U7.2
P6.6: P6.13 U7.3 | length 1556.8
  Top Layer w6: P6.13 259.86,2320 302.38,2277.47 347.47,2277.47 768,2698 U7.3
P7.0: P5.4 U7.5
P8.1: MOS1.1 U7.16
P8.2: MOS2.1 U7.17
RST: P4.2 RST.2 U7.76 | length 3630.5
  Top Layer w6: U7.76 1738.5,2818.5 1738.5,2879.18 1665.68,2952 1434.32,2952 1316.32,2834 977.02,2834 612.52,3198.5 RST.2 682.05,3673.23 956.69,3673.23 1141.73,3858.27 2171.73,3858.27 P4.2
TEST/SBWTCK: P4.1 U7.71
VCC: C19.1 C20.1 C22.1 C25.1 C26.1 C27.1 C28.1 C36.2 C37.2 C38.2 Cin1.2 P3.1 P5.1 P5.15 P6.1 P6.15 R3.2 R4.2 R6.1 R11.2 R12.2 S1.P2 S1.P6 S1.P8 S2.3 S2.7 S2.13 S3.5 S3.8 S3.12 TPS1.6 TPS1.7 TPS1.9 TPS1.10 U5.3 U7.18 U7.50 | length 2076.2
  Top Layer w6: C36.2 927.17,2427.17 C37.2 1498.03,2427.17 1523.2,2402 U7.18 ; C25.1 1031.5,3216.53 1051.18,3196.85 S2.13 ; TPS1.10 1046.87,1865.77 1149.61,1968.5 Cin1.2 ; S2.3 C26.1 ; C19.1@1970.5,3365.91 1980.12,3356.3 S1.P8 ; U7.50 2317.56,2540 C38.2 ; S1.P2 C20.1@2299.21,3330.71 ; C28.1 S3.5 ; S3.8 2897.64,3175.2 C27.1@2899.61,3173.23
  Bottom Layer w6: U5.3@3460.63,1098.42 C22.1
pads on no net: C1.1 C1.2 C2.1 C2.2 C3.1 C3.2 C4.1 C4.2 C5.1 C5.2 C6.1 C6.2 C7.1 C7.2 C8.1 C8.2 C9.1 C9.2 C10.1 C10.2 C11.1 C11.2 C12.1 C12.2 C13.1 C13.2 C14.1 C14.2 C15.1 C15.2 C16.1 C16.2 C17.1 C17.2 C18.1 C18.2 E1.1 E1.2 J1.1 J1.2 J1.3 J1.4 J1.5 J1.6 J1.7 J1.8 J1.9 J1.10 L1.1 L1.2 L2.1 L2.2 L3.1 L3.2 L4.1 L4.2 P1_1.1 P1_1.2 P1_1.3 P1_1.4 P1_1.5 S2.2 S2.5 S2.8 S2.16 S2.18 S3.10 S3.11 TPS1.2 TPS1.5 TPS1.11 U1.1 U1.2 U2.1 U2.2 U3.1 U3.2 U4.1 U4.2 U4.3 U4.4 U4.5 U4.6 U4.7 U4.8 U4.9 U4.10 U4.11 U4.12 U4.13 U4.14 U4.15 U4.16 U4.17 U4.18 U4.19 U4.20 U4.21 U4.22 U4.23 U4.24 U4.25 U4.26 U4.27 U4.28 U4.29 U4.30 U4.31 U4.32 U4.33 U5.4 U5.7 U6.1 U6.7 U6.8 U6.14 U7.4 U7.6 U7.7 U7.8 U7.9 U7.10 U7.15 U7.53 U7.55 U7.56 U7.57 U7.58 U7.59 U7.60 U7.62 U7.63 U7.64 U7.69 U7.70 U7.72 U7.73 U7.74 U7.75 Y1.1 Y1.2 Y1.3 Y1.4 Y2.1 Y2.2
copper on no net: | length 15100.4
  Top Layer w6: 416.31,1075.17 458.47,1075.17 ; 688.94,824.17 689.96,825.2 v1(689.96,862.2) ; 765.31,808.86 766.73,810.27 766.73,825.79 784.45,843.5 823.82,843.5 825.79,841.53 ; 908.94,231.17 910.31,232.55 ; 910,404.17 910.31,404.49 ; 910,634.17 910.31,633.86 ; 910.31,478.86 910.63,479.17 ; 910.31,514.49 910.63,514.17 ; 915,592.56 910.31,587.87 910.72,587.47 950.31,587.47 ; 915,634.17 921.42,634.17 ; 964.57,1312.99 965.55,1312.01 v1(965.55,1255.9) ; v1(980.31,774.17) v1@988.19,782.05 ; v1@1019.31,738.17 v1@1019.68,737.8 ; 1045.79,467.32 1045.79,524.17 ; 1079.21,924.17 v1(1101.38,924.17) 1115.31,938.11 ; 1104.84,466.02 1104.84,524.17 ; 1115.31,1004.17 1115.31,938.11 ; v1(1155.31,749.17) 1173.94,749.17 ; 1184.31,691.55 1312.69,563.17 1571.31,563.17 1654.31,649.17 ; 1190.31,931.17 1183.31,924.17 v1(1140.31,924.17) 1126.38,938.11 1115.31,938.11 ; 1476.63,848.17 1476.63,847.68 1539.76,784.55 v1(1539.76,783.86) ; 1516,649.17 1604.31,649.17 ; 1516,699.17 1604.31,699.17 ; 1516,848.17 1603,848.17
  Top Layer w7: 312.31,1078.17 423.94,966.55 747.22,966.55 882.33,831.44 882.33,822.95 891.3,813.98 905.07,813.98 905.51,813.54 ; 458.47,1075.17 552.22,981.42 753.38,981.42 905.51,829.29 ; 513.31,1077.17 556.47,1077.17 637.35,996.3 777.87,996.3 925.2,848.98 ; v1(595.31,679.17) 624.31,679.17 625.31,678.17 ; 611.31,1079.17 679.31,1011.17 792.53,1011.17 940.51,863.19 940.51,849.41 940.94,848.98 ; 633.82,767.48 633.82,723.67 768.81,723.67 794.31,749.17 v1(801.31,749.17) ; v1(640.31,589.17) 640.31,623.17 ; 688.94,780.55 688.94,824.17 ; 713.31,1078.17 746.56,1078.17 956.26,868.48 956.26,849.41 956.69,848.98 ; v1(800.31,607.17) 800.31,639.49 800.31,640.17 ; 800.31,678.86 800.31,712.17 870.31,782.17 902.31,782.17 ; 825.79,797.79 905.51,797.79 ; v1(835.31,607.17) 835.31,639.49 835.31,640.17 ; 835.31,678.86 857,678.86 897.31,719.17 ; v1(859.74,718.94) 873.08,718.94 888.51,734.37 898.31,734.37 ; v1@870.26,750.11 897.31,750.11 ; 874.31,632.17 875.31,631.17 v1(875.31,609.17) ; 905.51,766.3 970.44,766.3 ; 915,634.17 915,658.86 925.31,669.17 925.31,698.17 ; 940.51,698.17 940.51,685.15 940.31,684.96 940.31,665.17 955.31,650.17 955.31,622.87 ; 950.31,508.17 953.31,511.17 ; 956.69,699.37 956.69,752.55 970.44,766.3 ; 972.81,848.98 v1@972.81,883.17 ; v1@978.81,774.67 v1@979.31,775.17 ; v1@980.31,773.17 973.44,766.3 970.44,766.3 ; 988.19,699.37 988.19,660.3 1045.31,603.17 1045.31,524.64 ; v1@988.19,782.05 988.19,848.98 ; 1000.31,470.17 v1(1000.31,489.17) ; 1003.94,699.37 1003.94,668.55 1105.31,567.17 1105.31,525.17 ; 1003.94,848.98 1003.94,886.79 1038.31,921.17 ; 1019.68,699.37 v1@1019.68,737.8 ; 1019.68,848.98 1019.68,868.54 1035.31,884.17 1054.21,884.17 1059.21,889.17 1059.21,948.07 1075.31,964.17 1075.31,1079.17 ; 1035.43,699.37 1037.63,697.17 1062.92,697.17 1272.92,487.17 ; 1035.63,849.17 1050.31,849.17 1079.21,878.07 1079.21,924.17 ; 1053.31,750.17 1119.31,750.17 1165.31,704.17 1175.31,704.17 ; 1055.12,719.05 1062.07,719.05 1278.14,502.99 ; 1055.12,734.8 1055.55,734.37 1069.33,734.37 1285.53,518.17 ; 1055.12,766.3 1137.44,766.3 1170.31,799.17 1190.31,799.17 ; 1055.12,782.05 1128.19,782.05 1170.31,824.17 1357.31,824.17 1419.31,762.17 1419.31,618.17 1450.31,587.17 1490.31,587.17 1514.31,611.17 1514.31,646.49 1516,648.17 ; 1055.12,797.79 1113.94,797.79 1165.31,849.17 1400.31,849.17 1512.31,737.17 1512.31,697.17 ; 1055.12,813.54 1096.68,813.54 v1(1127.31,844.17) ; 1150.31,471.17 v1(1150.31,519.17) ; 1247.31,796.17 1264.31,779.17 v1(1305.31,779.17) ; v1(1289.31,548.17) 1304.44,533.05 1832.68,533.05 ; 1475.31,650.17 1477.31,648.17 v1(1477.31,617.17) ; 1476.31,698.17 v1(1476.31,726.17)
  Top Layer w9: 640.31,773.98 640.31,824.17 ; 688.94,624.17 688.94,672.99 v1@696.81,680.87 ; 1039.53,924.17 1039.53,1013.38
  Top Layer w20: v1(740.16,769.68) 763.78,769.68 ; v1(776.69,677.79) 800.33,678.22 835.31,678.86 ; 915.31,232.55 915.31,439.49 ; 915.31,514.49 915.31,550.47 ; 915.31,587.87 915.31,633.86 ; 915.63,479.17 915.63,514.17
  Top Layer w25: v1(796.26,794.29) 825.79,794.29 ; 1035.31,1017.6 v1(1035.31,1089.17) 1035.31,1243.17 ; 1035.31,1374.17 1035.31,1243.17 ; v1@1090.31,1149.17 1140.31,1149.17 1160.75,1128.74 1160.75,1084.17 ; 1654.31,649.17 1707.76,648.62 1738.31,679.17 1738.31,936.17 1431.31,1243.17 1035.31,1243.17
  Bottom Layer w7: v1(695.28,682.48) 737.24,682.48 766.43,653.3 790.44,653.3 856.08,718.94 v1(859.74,718.94) ; v1(801.31,749.17) v1(869.31,749.17) ; 877.31,1476.38 877.31,1424.17 1248.31,1053.17 1383.31,1053.17 1439.31,997.17 1439.31,885.17 ; v1(973.31,884.17) 1569.31,884.17 1604.31,849.17 ; v1(1127.31,844.17) 1127.31,710.17 v1(1289.31,548.17) v1@1290.31,547.17
  Bottom Layer w25: v1@776.31,677.17 740.16,713.33 v1(740.16,769.68) 740.16,855.02 1034.31,1149.17 1097.31,1149.17 ; v1(796.26,794.29) 1035.31,1029.17 v1(1035.31,1089.17)
  other v1: 325.31,234.17 385.31,234.17 445.31,234.17 505.31,234.17 565.31,234.17 625.31,234.17 685.31,234.17 745.31,234.17 805.31,234.17 990.31,234.17 1050.31,234.17 1095.31,234.17 1155.31,234.17 265.31,269.17 835.31,269.17 479.33,271.65 25.31,274.17 85.31,274.17 145.31,274.17 205.31,274.17 1205.31,274.17 1265.31,274.17 1325.31,274.17 1385.31,274.17 1445.31,274.17 950.31,279.17 1525.31,289.17 1620.31,289.17 875.31,304.17 480.31,309.17 950.31,314.17 400.31,329.17 1360.31,334.17 1445.31,334.17 875.31,339.17 1000.31,339.17 1065.31,339.17 1130.31,339.17 1280.31,344.17 480.31,349.17 950.31,349.17 715.31,354.17 1200.31,369.17 1540.31,369.17 875.31,374.17 950.31,384.17 480.31,389.17 400.31,394.17 1445.31,394.17 555.31,404.17 1365.31,414.17 1700.31,414.17 1735.31,414.17 1770.31,414.17 950.31,419.17 1000.31,424.17 1040.31,424.17 1080.31,424.17 1120.31,424.17 1155.31,424.17 480.31,429.17 1280.31,429.17 875.31,434.17 715.31,449.17 1193.9,456.69 400.31,459.17 480.31,469.17 875.31,469.17 1235.31,469.17 875.31,504.17 480.31,509.17 400.31,519.17 1190.31,519.17 875.31,539.17 990.31,544.17 480.31,549.17 1150.31,554.17 400.31,574.17 875.31,574.17 480.31,589.17 520.31,589.17 560.31,589.17 600.31,589.17 680.31,589.17 720.31,589.17 740.31,619.17 460.31,634.17 545.31,649.17 505.31,704.17 1315.31,704.17 575.31,719.17 1220.31,729.17 1325.31,729.17 395.31,739.17 940.31,739.17 980.31,739.17 1020.31,739.17 1315.31,754.17 575.31,759.17 505.31,769.17 941.31,773.17 1020.31,774.17 575.31,799.17 940.31,809.17 980.31,810.17 1017.31,810.17 505.31,834.17 590.31,834.17 1270.31,959.17 1325.31,994.17 1370.31,994.17 1270.31,1019.17 1729.31,1079.17 1265.31,1089.17 1415.31,1124.17 1475.31,1124.17 935.31,1139.17 1320.31,1139.17 970.31,1144.17 1081.69,1148.62 935.31,1179.17 970.31,1179.17 1170.31,1194.17 905.31,1214.17 905.31,1269.17 1216.31,1322.17 1214.31,1416.17 1729.31,1416.17

## Polygon pours and split planes (outlines as drawn)
no net on Bottom Layer "Bottom Layer-GND" (solid, remove dead copper, pour order 4): 5.41,254.92 256.41,254.92 295.78,215.55 1176.02,215.55 1215.05,255.06 1836.11,255.06 1836.11,1469.63 1828.24,1469.63 1812.49,1469.63 4.44,1469.63
no net on Top Layer "Top Layer-GND" (solid, remove dead copper, pour order 6): 5.41,254.92 256.41,254.92 295.78,215.55 1176.02,215.55 1215.05,255.06 1836.11,255.06 1836.11,1448.96 1836.11,1468.65 1811.51,1468.65 4.44,1468.65

## Other copper
Top Layer:
  rectangle: 1160.31,1024.17 1180.31,1069.17
  region: 1111.31,1129.17 1111.31,1170.17 1060.31,1170.17 1060.31,1129.17
  region: 880.94,251.98 880.94,215.17 295.94,215.17 255.94,255.17 5.94,255.17 5.94,295.17 265.94,295.17 309.13,251.98
  region: 943.81,214.57 943.81,254.57 1153.81,254.57 1193.81,294.57 1463.81,294.57 1463.81,254.57 1213.81,254.57 1173.81,214.57
Bottom Layer:
  pour cut-out: 1090.31,969.17 1165.31,969.17 1165.31,899.17 1090.31,899.17

## Silkscreen, mask and mechanical layers (free items; w line width, h text height)
Top Overlay:
  text "5V" at 1820,3622.16 h39.37 r90
  text "Gnd" at 1710,3582.8 h39.37 r90
  text "RST" at 2290,3582.8 h39.37 r90
  text "Test" at 2390,3556.56 h39.37 r90
  text "3.3V" at 1920,3550 h39.37 r90
  text "P4.5" at 2090,3550 h39.37 r90
  text "P4.4" at 2190,3550 h39.37 r90
  text "Vcc" at 46.24,2900 h39.37
  text "Gnd" at 390,2900 h39.37
  text "Vcc" at 3436.24,2900 h39.37
  text "Gnd" at 3790,2900 h39.37
  text "P3.5" at 13.44,2800 h39.37
  text "P6.0" at 390,2800 h39.37
  text "P3.0" at 3403.44,2800 h39.37
  text "P7.0" at 3790,2800 h39.37
  text "P3.6" at 26.56,2700 h39.37
  text "P6.1" at 390,2700 h39.37
  text "P3.1" at 3416.56,2700 h39.37
  text "P4.5" at 3790,2700 h39.37
  text "P3.7" at 20,2600 h39.37
  text "P6.2" at 390,2600 h39.37
  text "P1.2" at 3410,2600 h39.37
  text "P4.4" at 3790,2600 h39.37
  text "P5.4" at 20,2500 h39.37
  text "P6.3" at 390,2500 h39.37
  text "P1.3" at 3410,2500 h39.37
  text "P4.3" at 3790,2500 h39.37
  text "P5.5" at 20,2400 h39.37
  text "P6.4" at 390,2400 h39.37
  text "P1.4" at 3410,2400 h39.37
  text "P4.0" at 3790,2400 h39.37
  text "P6.6" at 20,2300 h39.37
  text "P6.5" at 390,2300 h39.37
  text "P1.5" at 3410,2300 h39.37
  text "P4.7" at 3790,2300 h39.37
  text "Vcc" at 46.24,2200 h39.37
  text "Gnd" at 390,2200 h39.37
  text "Vcc" at 3436.24,2200 h39.37
  text "Gnd" at 3790,2200 h39.37
  text "RESET" at 682.48,1420.67 h60
  text "DVDD_TRANS" at 1129.33,1420.67 h60
  text "JTAG" at 1561.31,908.17 h60
Mechanical 16:
  drawing of 1870 lines, arcs and shapes, not listed
  text "1" at -2432.53,5236.57 h70
  text "2" at 427.47,5236.57 h70
  text "3" at 3307.47,5236.57 h70
  text "4" at 6177.47,5236.57 h70
  text "A" at -3784.53,4330.57 h70
  text "A" at 7515.47,4330.57 h70
  text "B" at -3784.53,2438.57 h70
  text "C" at -3784.53,528.57 h70
  text "ENGINEER:" at 2990.47,-928.43 h45
  text "TITLE:" at 4490.47,-928.43 h45
  text "PCB DESIGNER:" at 2990.47,-1223.43 h45
  text "D" at -3784.53,-1361.43 h70
  text "D" at 7515.47,-1361.43 h70
  text "DATE:" at 2990.47,-1528.43 h45
  text "PART NO.:" at 4490.47,-1528.43 h45
  text "REV:" at 6590.47,-1528.43 h45
  text "Altium Limited" at 1690.47,-1628.43 h70
  text ".PRINT_DATE" at 3040.47,-1648.43 h70
  text "12a Rodborough Rd" at 1690.47,-1728.43 h70
  text "Frenchs Forest" at 1690.47,-1828.43 h70
  text "FILE NAME:" at 2990.47,-1828.43 h45
  text "DWG NO:" at 4490.47,-1828.43 h45
  text "SCALE:" at 6590.47,-1828.43 h45
  text "NSW 2086" at 1690.47,-1928.43 h70
  text ".PCB_FILE_NAME_NO_PATH" at 3040.47,-1948.43 h70
  text "1" at -2432.53,-2163.43 h70
  text "2" at 427.47,-2163.43 h70
  text "3" at 3307.47,-2163.43 h70
  text "4" at 6177.47,-2163.43 h70

## Text inside footprints (layer, text, board x,y; h text height)
Q1: Top Overlay "3" at 3140.75,1075.08 h59.05; Top Overlay "1" at 3140.75,1174.21 h59.05